# Altium PCB PCBRelais.PcbDoc
Units mil, origin at the board's own origin, x right, y up, seen from the top; angles counter-clockwise.
Board outline 6330 x 8590 mil, 2 copper layers (Top Layer, Bottom Layer), stack 21 mil thick; 40 components, 54 nets, 153 pads, 3 vias.
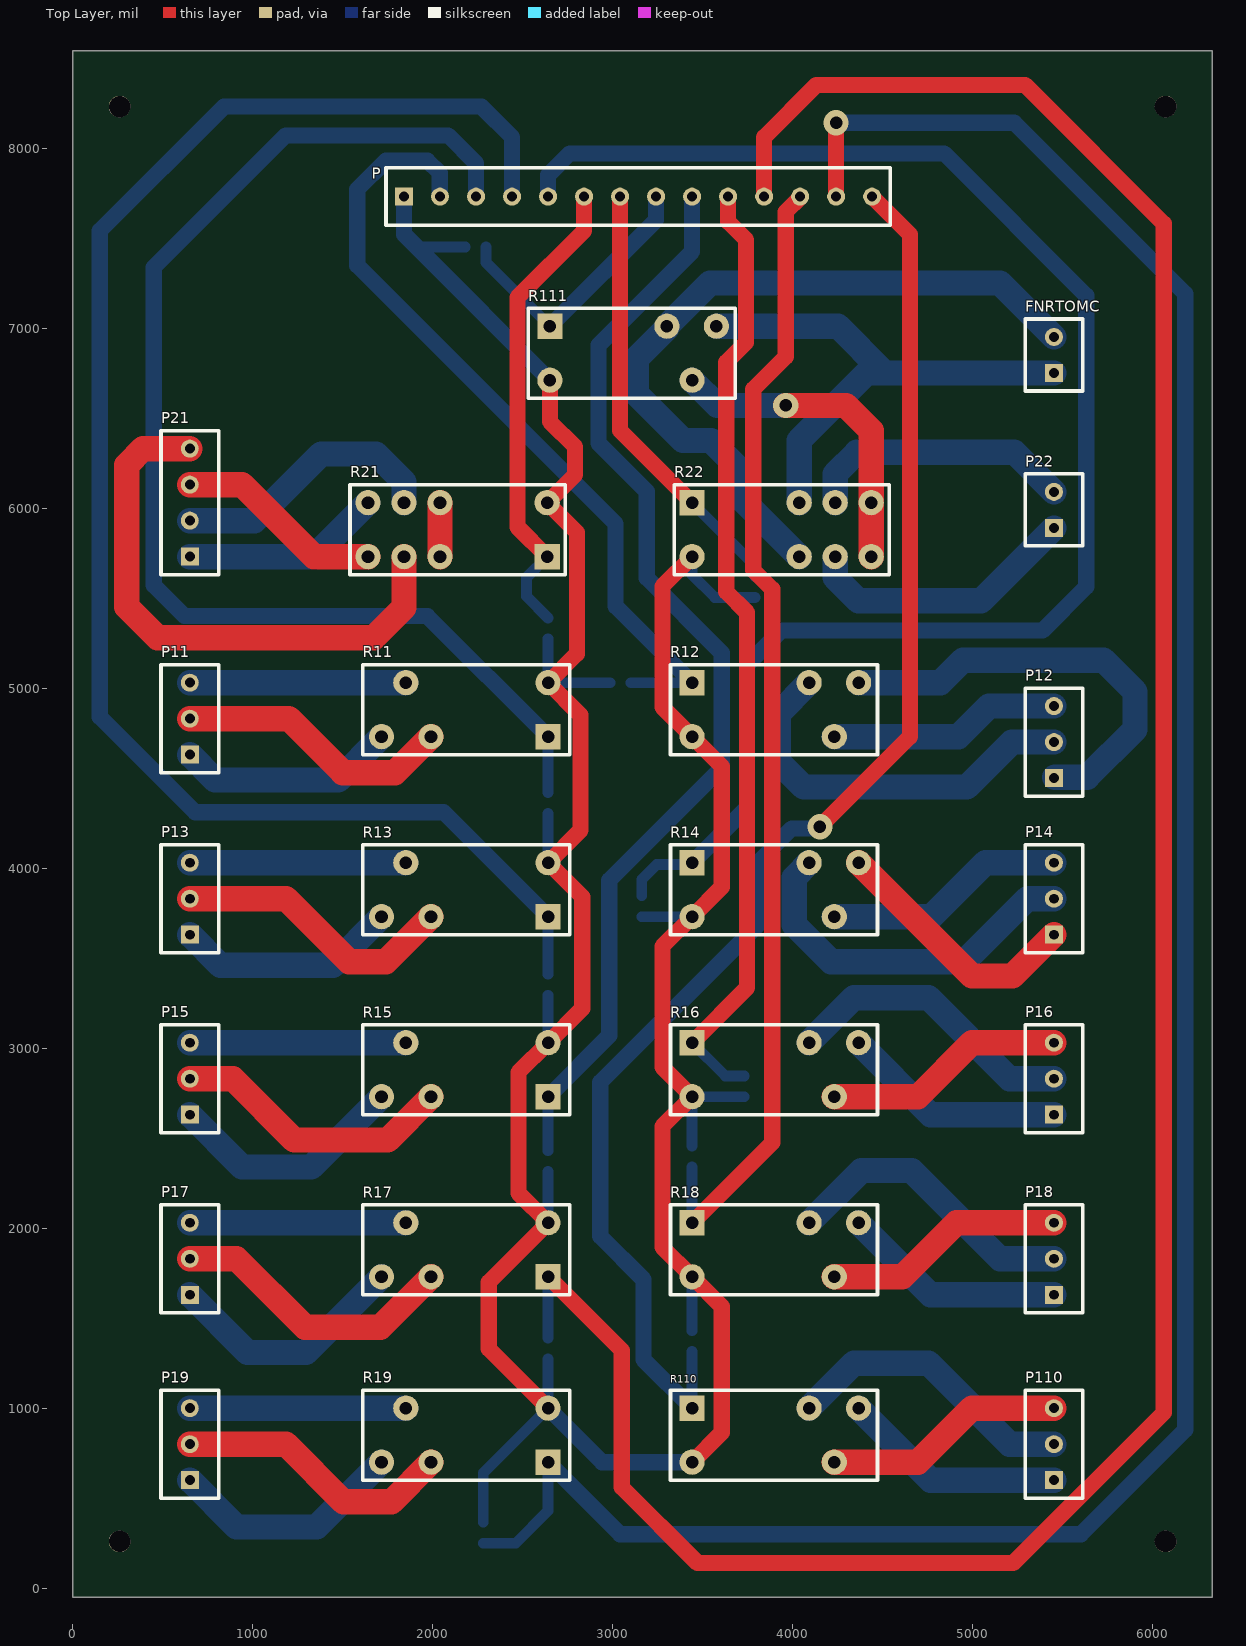
[diagram p0: Top Layer view]
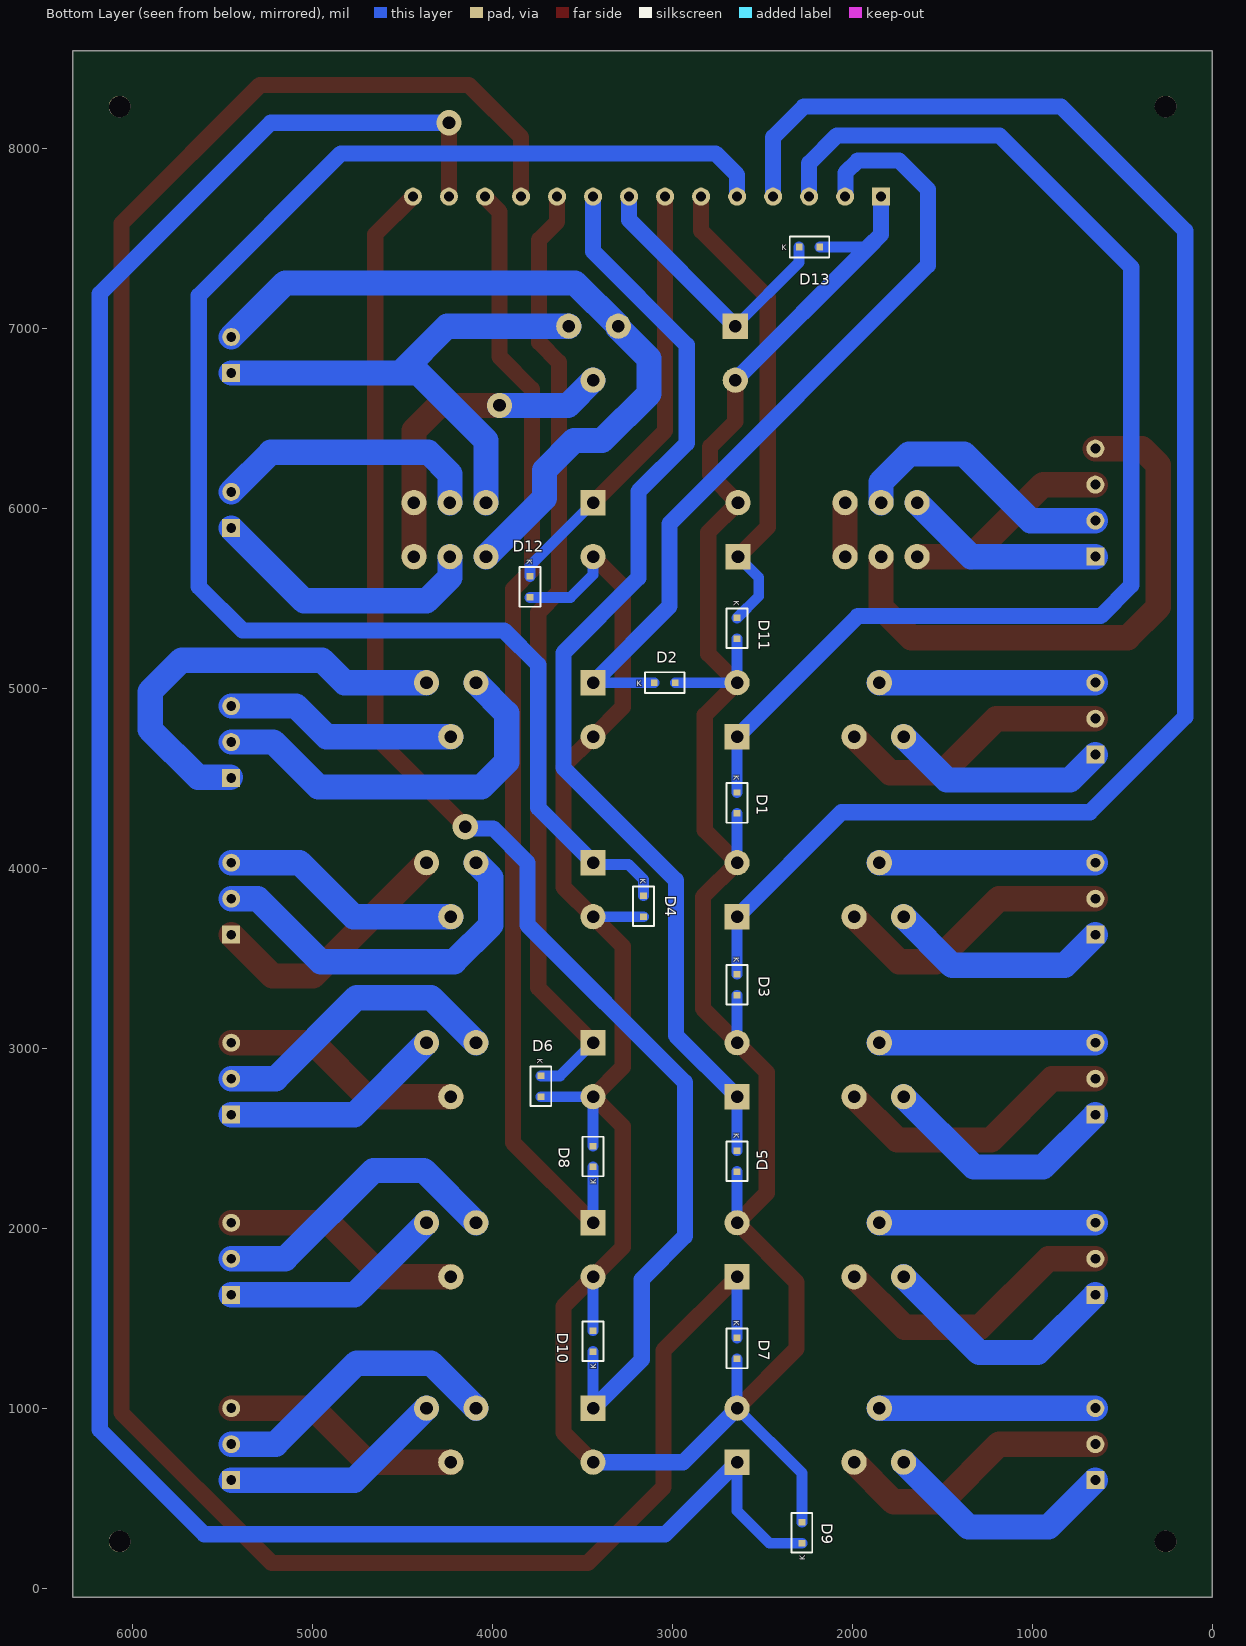
[diagram p1: Bottom Layer view, seen from below]

## Layer stack, top to bottom
Top Solder: solder mask 1, Solder Resist, Dk 3.5
Top Layer: signal copper 3
Dielectric 1: dielectric 15, FR-4, Dk 4.8
Bottom Layer: signal copper 3
Bottom Solder: solder mask 1, Solder Resist, Dk 3.5

## Board outline
0,-50 6330,-50 6330,8540 0,8540

## Design rules (kind name [scope] priority, off if disabled: settings)
Clearance [All] p1: gap=50 ignorepadtopadclearanceinfootprint=FALSE
PolygonConnect [All] p1: connectstyle=Relief reliefconductorwidth=10 reliefentries=4 polygonreliefangle="90 Angle" airgapwidth=10
RoutingVias [All] p1: holewidth=60 width=100 viastyle="Through Hole" minholewidth=60 minwidth=100 maxholewidth=60 maxwidth=100
SolderMaskExpansion [All] p1: expansion=4
Width [All] p1: maxlimit=150 minlimit=50 preferedwidth=90 minimp=50.000000 maximp=50.000000 favimp=50.000000
30 further rules are at their usual default settings.

## Components (designator, comment, footprint, x,y, rotation, side; value= is the part's Value field where it differs from the comment)
D1 "DiodeFLY" DiodeFLY 2663,4442 r270 bottom
D2 "DiodeFLY" DiodeFLY 3122,5007 r180 bottom
D3 "DiodeFLY" DiodeFLY 2663,3432 r270 bottom
D4 "DiodeFLY" DiodeFLY 3183,3868 r270 bottom
D5 "DiodeFLY" DiodeFLY 2663,2452 r270 bottom
D6 "DiodeFLY" DiodeFLY 3753,2868 r270 bottom
D7 "DiodeFLY" DiodeFLY 2663,1412 r270 bottom
D8 "DiodeFLY" DiodeFLY 3417,2318 r90 bottom
D9 "DiodeFLY" DiodeFLY 2257,228 r90 bottom
D10 "DiodeFLY" DiodeFLY 3417,1292 r90 bottom
D11 "DiodeFLY" DiodeFLY 2663,5412 r270 bottom
D12 "DiodeFLY" DiodeFLY 3813,5642 r270 bottom
D13 "DiodeFLY" DiodeFLY 2318,7427 r180 bottom
FNRTOMC "Header 2" HDR2 5450,6650 r90 top
P "MHDR1X14" HDR14 1740,7730 r0 top
P11 "Header 3" HDR3 650,4530 r90 top
P12 "Header 3" HDR3 5450,4400 r90 top
P13 "Header 3" HDR3 650,3530 r90 top
P14 "Header 3" HDR3 5450,3530 r90 top
P15 "Header 3" HDR3 650,2530 r90 top
P16 "Header 3" HDR3 5450,2530 r90 top
P17 "Header 3" HDR3 650,1530 r90 top
P18 "Header 3" HDR3 5450,1530 r90 top
P19 "Header 3" HDR3 650,500 r90 top
P21 "Header 4" HDR4 650,5630 r90 top
P22 "Header 2" HDR2 5450,5790 r90 top
P110 "Header 3" HDR3 5450,500 r90 top
R11 "OnePR" EENPOOL 2740,4730 r180 top
R12 "OnePR" EENPOOL 3340,5030 r0 top
R13 "OnePR" EENPOOL 2740,3730 r180 top
R14 "OnePR" EENPOOL 3340,4030 r0 top
R15 "OnePR" EENPOOL 2740,2730 r180 top
R16 "OnePR" EENPOOL 3340,3030 r0 top
R17 "OnePR" EENPOOL 2740,1730 r180 top
R18 "OnePR" EENPOOL 3340,2030 r0 top
R19 "OnePR" EENPOOL 2740,700 r180 top
R21 "TwoPR" TWEEPOOL 2735,5730 r180 top
R22 "TwoPR" TWEEPOOL 3340,6030 r0 top
R110 "OnePR" EENPOOL 3340,1000 r0 top
R111 "OnePR" EENPOOL 2550,7010 r0 top

## Footprints (in the part's own frame and the unit in brackets; to place one, negate y for a bottom-side part, rotate by r counter-clockwise, add the part's x,y. Pads: shape width x height; smd on the part's side, far side on the other; paste and mask are expansions set on the pad)
DiodeFLY [mil]
  rect 36x38 smd: 1(22,23) 2(138,23)
  silkscreen extent -30,-35 190,81
EENPOOL [mil]
  rect 140x140 hole 70: 1(100,0)
  round 140 hole 70: 2(100,-300) 3(890,-300) 4(750,0) 5(1025,0)
  silkscreen extent -20,-400 1130,100
HDR2 [mil]
  rect 100x100 hole 55: 1(100,0)
  round 100 hole 55: 2(300,0)
  silkscreen extent 0,-160 400,160
HDR3 [mil]
  rect 100x100 hole 55: 1(100,0)
  round 100 hole 55: 2(300,0) 3(500,0)
  silkscreen extent 0,-160 600,160
HDR4 [mil]
  rect 100x100 hole 55: 1(100,0)
  round 100 hole 55: 2(300,0) 3(500,0) 4(700,0)
  silkscreen extent 0,-160 800,160
HDR14 [mil]
  rect 100x100 hole 55: 1(100,0)
  round 100 hole 55: 2(300,0) 3(500,0) 4(700,0) 5(900,0) 6(1100,0) 7(1300,0) 8(1500,0) 9(1700,0) 10(1900,0) 11(2100,0) 12(2300,0) 13(2500,0) 14(2700,0)
  silkscreen extent 0,-160 2800,160
TWEEPOOL [mil]
  rect 140x140 hole 70: 1(100,0)
  round 140 hole 70: 2(100,-300) 3(695,0) 4(895,0) 5(1095,0) 6(695,-300) 7(895,-300) 8(1095,-300)
  silkscreen extent 0,-400 1195,100

## Part data
FNRTOMC P22: "Header, 2-Pin", LatestRevisionDate=17-Jul-2002, LatestRevisionNote="Re-released for DXP Platform.", Publisher="Altium Limited"
P: "Header, 14-Pin", LatestRevisionDate=17-Jul-2002, LatestRevisionNote="Re-released for DXP Platform.", Publisher="Altium Limited"
P11 P12 P13 P14 P15 P16 P17 P18 P19 P110: "Header, 3-Pin", LatestRevisionDate=17-Jul-2002, LatestRevisionNote="Re-released for DXP Platform.", Publisher="Altium Limited"
P21: "Header, 4-Pin", LatestRevisionDate=17-Jul-2002, LatestRevisionNote="Re-released for DXP Platform.", Publisher="Altium Limited"
R11 R12 R13 R14 R15 R16 R17 R18 R19 R110 R111: library part R1
R21 R22: library part R2

## Free pads (board coordinates)
  round 120 hole 120 unplated: 2(6070,260) 3(260,260) 4(260,8230) 5(6070,8230)

## Via types
v1: diameter 140, hole 70, Top Layer to Bottom Layer, 3 vias

## Nets (pads, with @x,y where several pads share a name; then routed paths per layer and width w, separated by ;. In a path a pad name is that pad's centre, name@x,y a point inside that pad or via, vN(x,y) a via of type N, cw(c..) or ccw(c..) an arc to the next point about the centre after c; other vN are vias at no path point)
NetD1_1: D1.1 P.3 R11.1 | length 6971.3
  Top Layer w90: R11.1@2630,4720 R11.1
  Bottom Layer w60: D1.1 R11.1
  Bottom Layer w90: P.3 2240,7915 2085,8070 1183,8070 450,7337 450,5571 621,5400 1970,5400 R11.1
NetD1_2: D1.2 D2.2 D3.2 D4.2 D5.2 D6.2 D7.2 D8.2 D9.2 D10.2 D11.2 D12.2 D13.2 P.1 R11.2 R12.2 R13.2 R14.2 R15.2 R16.2 R17.2 R18.2 R19.2 R21.2 R22.2 R110.2 R111.2 | length 19059.9
  Top Layer w90: R19.2 2310,1330 2310,1700 R17.2 2475,2195 2475,2865 R15.2 2830,3220 2830,3840 R13.2 2820,4210 2820,4850 R11.2 2800,5190 2800,5865 R21.2 2790,6185 2790,6340 2650,6480 R111.2 ; R110.2 3605,865 3605,1565 R18.2 3275,1895 3275,2565 R16.2 3275,2895 3275,3565 R14.2 3605,3895 3605,4565 R12.2 3275,4895 3275,5565 R22.2
  Bottom Layer w60: 1910,7450 D13.2 ; D9.2 2280,640 R19.2 D7.2 ; R17.2 D5.2 ; R15.2 D3.2 ; R13.2 D1.2 ; D11.2 R11.2 D2.2 ; D4.2 R14.2 ; D10.2 R18.2 ; D8.2 R16.2 D6.2 ; R22.2 3440,5630 3566,5504 D12.2
  Bottom Layer w90: P.1 1840,7520 1910,7450 R111.2 ; R19.2 2940,700 R110.2
NetD2_1: D2.1 P.2 R12.1 | length 4535.7
  Bottom Layer w60: D2.1 R12.1
  Bottom Layer w90: P.2 2038.09,7731.91 2038.09,7861.91 1970,7930 1740,7930 1580,7770 1580,7348 3015.34,5912.66 3015.34,5454.66 R12.1
NetD3_1: D3.1 P.4 R13.1 | length 8946
  Bottom Layer w60: D3.1 R13.1
  Bottom Layer w90: P.4 2440,8060 2270,8230 840,8230 150,7540 150,4840 680,4310 2060,4310 R13.1
NetD4_1: D4.1 P.5 R14.1 | length 8803.7
  Bottom Layer w60: D4.1 3160,3936.22 3243.78,4020 R14.1@3430,4020
  Bottom Layer w90: P.5 2640,7850 2760,7970 4840,7970 5630,7180 5630,5563 5387,5320 3935,5320 3745,5130 3745,4335 R14.1 R14.1@3430,4020
NetD5_1: D5.1 P.9 R15.1 | length 6198.8
  Bottom Layer w60: D5.1 R15.1
  Bottom Layer w90: R15.1 2980,3070 2980,3933 3605,4558 3605,5195 3188,5612 3188,6092 2920,6360 2920,6905 3440,7425 P.9
NetD6_1: D6.1 P.10 R16.1 | length 5327.2
  Top Layer w90: R16.1 3745,3335 3745,5420 3630,5535 3630,6810 3740,6920 3740,7490 3640,7590 P.10
  Bottom Layer w60: R16.1 3624,2846 D6.1
NetD7_1: D7.1 P.11 R17.1 | length 14803.4
  Top Layer w90: R17.1 3049,1321 3049,561 3470,140 5224.35,140 6060,975.65 6060,7580 5290,8350 4130,8350 3840,8060 P.11
  Bottom Layer w60: D7.1 R17.1
NetD8_1: D8.1 P.12 R18.1 | length 6345.5
  Top Layer w90: R18.1 3885,2475 3885,5550 3780,5655 3780,6660 3960,6840 3960,7644.94 4040,7724.94 P.12
  Bottom Layer w60: R18.1 D8.1
NetD9_1: D9.1 P.13 R19.1 | length 13704
  Top Layer w90: P.13 v1(4240,8140)
  Bottom Layer w60: D9.1 2460,250 2640,430 R19.1
  Bottom Layer w90: R19.1 3040,300 5600,300 6180,880 6180,7190 5230,8140 v1(4240,8140)
NetD10_1: D10.1 P.14 R110.1 | length 8140.2
  Top Layer w90: v1(4150,4230) 4650,4730 4650,7520 P.14
  Bottom Layer w60: R110.1 D10.1
  Bottom Layer w90: R110.1 3170,1270 3170,1715 2930,1955 2930,2810 3804,3684 3804,4030 3994.43,4220.43 4140.43,4220.43 v1(4150,4230)
NetD11_1: D11.1 P.6 R21.1 | length 2658.9
  Top Layer w90: R21.1 2470,5895 2470,7170 2840,7540 P.6
  Bottom Layer w60: R21.1 2520,5615 2520,5510 D11.1
NetD12_1: D12.1 P.7 R22.1 | length 2420.7
  Top Layer w90: P.7 3040,6430 R22.1
  Bottom Layer w60: R22.1 3790,5680 D12.1
NetD13_1: D13.1 P.8 R111.1 | length 1551
  Bottom Layer w60: D13.1 2296,7364 R111.1
  Bottom Layer w90: R111.1 3240,7600 P.8
NetFNRTOMC_1: FNRTOMC.1 R22.3 R111.5 | length 2957.8
  Bottom Layer w140: R111.5 4250,7010 4510,6750 ; R22.3 4035,6374.68 4410.32,6750 4510,6750 ; FNRTOMC.1 4510,6750
NetFNRTOMC_2: FNRTOMC.2 R22.6 R111.4 | length 4189.9
  Bottom Layer w90: 3130,6634.68 3130,6635 ; R111.4@3300,7000 R111.4
  Bottom Layer w140: 3130,6634.68 3390,6374.68 3545.32,6374.68 3710,6210 3710,6055 R22.6 ; 3130,6635 3130,6830 R111.4@3300,7000 ; R111.4 3540,7250 5150,7250 FNRTOMC.2
NetP11_1: P11.1 R11.5 | length 1222.4
  Bottom Layer w140: P11.1 790,4490 1475,4490 R11.5
NetP11_2: P11.2 R11.4 | length 1547.1
  Top Layer w140: P11.2 1200,4830 1500,4530 1790,4530 R11.4
NetP11_3: P11.3 R11.3 | length 1200
  Bottom Layer w140: P11.3 R11.3
NetP12_1: P12.1 R12.5 | length 2431.1
  Bottom Layer w90: P12.1 P12.1@5455,4505
  Bottom Layer w140: R12.5 4820,5030 4945,5155 5725,5155 5900,4980 5900,4770 5635,4505 P12.1@5455,4505
NetP12_2: P12.2 R12.4 | length 2202
  Bottom Layer w140: R12.4 3920,4860 3920,4590 4060,4450 4966,4450 5216,4700 P12.2
NetP12_3: P12.3 R12.3 | length 1290.4
  Bottom Layer w140: R12.3 4920,4730 5090,4900 P12.3
NetP13_1: P13.1 R13.5 | length 1247.3
  Bottom Layer w140: P13.1 820,3460 1445,3460 R13.5
NetP13_2: P13.2 R13.4 | length 1588.5
  Top Layer w140: P13.2 1185,3830 1535,3480 1740,3480 R13.4
NetP13_3: P13.3 R13.3 | length 1200
  Bottom Layer w140: P13.3 R13.3
NetP14_1: P14.1 R14.5 | length 1441.2
  Top Layer w140: R14.5 4995,3400 5220,3400 P14.1
NetP14_2: P14.2 R14.4 | length 2051.9
  Bottom Layer w140: R14.4 4008,3948 4008,3683.3 4211.3,3480 4953,3480 5303,3830 P14.2
NetP14_3: P14.3 R14.3 | length 1344.3
  Bottom Layer w140: R14.3 4770,3730 5070,4030 P14.3
NetP15_1: P15.1 R15.5 | length 1346.7
  Bottom Layer w140: P15.1 940,2340 1325,2340 R15.5
NetP15_2: P15.2 R15.4 | length 1580.2
  Top Layer w140: P15.2 890,2830 1230,2490 1750,2490 R15.4
NetP15_3: P15.3 R15.3 | length 1200
  Bottom Layer w140: P15.3 R15.3
NetP16_1: P16.1 R16.5 | length 1250.7
  Bottom Layer w140: R16.5 4765,2630 P16.1
NetP16_2: P16.2 R16.4 | length 1649.9
  Bottom Layer w140: R16.4 4340,3280 4753,3280 5203,2830 P16.2
NetP16_3: P16.3 R16.3 | length 1344.3
  Top Layer w140: R16.3 4695.41,2730 4995.41,3030 P16.3
NetP17_1: P17.1 R17.5 | length 1371.5
  Bottom Layer w140: P17.1 970,1310 1295,1310 R17.5
NetP17_2: P17.2 R17.4 | length 1613.4
  Top Layer w140: P17.2 910,1830 1290,1450 1710,1450 R17.4
NetP17_3: P17.3 R17.3 | length 1200
  Bottom Layer w140: P17.3 R17.3
NetP18_1: P18.1 R18.5 | length 1250.7
  Bottom Layer w140: R18.5 4765,1630 P18.1
NetP18_2: P18.2 R18.4 | length 1683.1
  Bottom Layer w140: R18.4 4380,2320 4660,2320 5150,1830 P18.2
NetP18_3: P18.3 R18.3 | length 1344.3
  Top Layer w140: R18.3 4608,1730 4908,2030 P18.3
NetP19_1: P19.1 R19.5 | length 1321.8
  Bottom Layer w140: P19.1 910,340 1355,340 R19.5
NetP19_2: P19.2 R19.4 | length 1563.7
  Top Layer w140: P19.2 1184,800 1504,480 1770,480 R19.4
NetP19_3: P19.3 R19.3 | length 1200
  Bottom Layer w140: P19.3 R19.3
NetP21_1: P21.1 R21.8 | length 1114.3
  Bottom Layer w140: P21.1 1340,5730 R21.8
NetP21_2: P21.2 R21.7 | length 1522.5
  Bottom Layer w140: P21.2 1010,5930 1380,6300 1685,6300 1840,6145 R21.7
NetP21_3: P21.3 R21.5 | length 1155.7
  Top Layer w140: P21.3 939.59,6130 1339.59,5730 R21.5
NetP21_4: P21.4 R21.4 | length 3139.9
  Top Layer w140: P21.4 390,6330 300,6240 300,5450 470,5280 1673,5280 1840,5447 R21.4
NetP22_1: P22.1 R22.7 | length 1551.6
  Bottom Layer w140: R22.7 4235,5615 4365,5485 5045,5485 P22.1
NetP22_2: P22.2 R22.4 | length 1515.8
  Bottom Layer w140: R22.4 4235,6190 4355,6310 5230,6310 P22.2
NetP110_1: P110.1 R110.5 | length 1250.7
  Bottom Layer w140: R110.5 4765,600 P110.1
NetP110_2: P110.2 R110.4 | length 1649.9
  Bottom Layer w140: R110.4 4340,1250 4753,1250 5203,800 P110.2
NetP110_3: P110.3 R110.3 | length 1344.3
  Top Layer w140: R110.3 4695.41,700 4995.41,1000 P110.3
NetR21_3: R21.3 R21.6 | length 300
  Top Layer w140: R21.3 R21.6
NetR22_5: R22.5 R22.8 R111.3 | length 1811
  Top Layer w140: v1(3960,6570) 4295,6570 4435,6430 R22.5 R22.8
  Bottom Layer w140: R111.3 3580,6570 v1(3960,6570)

## Silkscreen, mask and mechanical layers (free items; w line width, h text height)
Outline:
  the board outline again, w10

## Text inside footprints (layer, text, board x,y; h text height)
D1: Bottom Overlay "K" at 2659,4516 h30 r90
D2: Bottom Overlay "K" at 3196,5011 h30
D3: Bottom Overlay "K" at 2659,3506 h30 r90
D4: Bottom Overlay "K" at 3179,3942 h30 r90
D5: Bottom Overlay "K" at 2659,2526 h30 r90
D6: Bottom Overlay "K" at 3749,2942 h30 r90
D7: Bottom Overlay "K" at 2659,1486 h30 r90
D8: Bottom Overlay "K" at 3421,2244 h30 r270
D9: Bottom Overlay "K" at 2261,154 h30 r270
D10: Bottom Overlay "K" at 3421,1218 h30 r270
D11: Bottom Overlay "K" at 2659,5486 h30 r90
D12: Bottom Overlay "K" at 3809,5716 h30 r90
D13: Bottom Overlay "K" at 2392,7431 h30